# EAGLE board On off system (EAGLE 9.7.0)

Size 211.69 x 70.56 mm. Coordinates in mm from the lower left corner, seen from the top.
Outline: 0,0 211.69,0 211.69,70.56 0,70.56 0,0
Copper layers (1*16): Top 0.035mm / dielectric 1.5mm / Bottom 0.035mm
Design rules "default": minimum track width 6mil, minimum drill 0.35mm, track to track 6mil, track to pad 6mil, pad to pad 6mil, via to via 6mil, smd to smd 6mil, copper to edge 40mil, drill to drill 6mil, minimum pad ring 10mil, minimum via ring 8mil, stop-mask expansion 4mil, vias tented up to drill 0mil, thermal gap 10mil

## Footprints (pad centres in the part's own frame; a part is rotated, then mirrored left to right if it is on the bottom)
DIODE-AXIAL = drill 1: 1 -5.08,0; 2 5.08,0
MOTOR = drill 1.118 pad 3.15 octagon: + 2.54,0; - -2.54,0
BATTERY-GENERIC = drill 1.118 pad 3.15 octagon: + 2.54,0; - -2.54,0
RESAD1016W63L850D250B = drill 0.83 pad 1.43: 1 -5.08,0; 2 5.08,0
SWITCH-MOMENTARY-PTH-6.5MM = drill 1.016 pad 1.88: 1 -3.251,2.261; 2 3.251,2.261; 3 -3.251,-2.261; 4 3.251,-2.261
TO92 = drill 0.813 octagon: 1 -1.27,0; 2 0,1.905; 3 1.27,0
ARDUINO-UNO-R3-SHIELD = drill 1.016 pad 1.88: 3.3V 24.13,-2.54; 5V 24.13,0; A0 24.13,12.7; A1 24.13,15.24; A2 24.13,17.78; A3 24.13,20.32; A4 24.13,22.86; A5 24.13,25.4; AREF -24.13,-13.97; D2 -24.13,20.32; D3 -24.13,17.78; D4 -24.13,15.24; D5 -24.13,12.7; D6 -24.13,10.16; D7 -24.13,7.62; D8 -24.13,3.81; D9 -24.13,1.27; D10 -24.13,-1.27; D11 -24.13,-3.81; D12 -24.13,-6.35; D13 -24.13,-8.89; GND@0 24.13,2.54; GND@1 24.13,5.08; GND@2 -24.13,-11.43; IOREF 24.13,-7.62; NC 24.13,-10.16; RES 24.13,-5.08; RX -24.13,25.4; SCL -24.13,-19.05; SDA -24.13,-16.51; TX -24.13,22.86; VIN 24.13,7.62

## Placement (x,y rotation side)
D1  DIODEDIODE-AXIAL  [DIODE-AXIAL]  142.32,43.03 90 top
M1  MOTOR_HDR  [MOTOR]  126.48,59.38 0 top
P1  BATTERYGENERIC  [BATTERY-GENERIC]  203.43,43.36 180 top
R1  10k  [RESAD1016W63L850D250B]  150.57,64.23 0 top
R2  1k  [RESAD1016W63L850D250B]  96.6,35.41 0 top
S1  SWITCH_MOMENTARY  [SWITCH-MOMENTARY-PTH-6.5MM]  104.22,26.52 90 top
T1  NMOSFET  [TO92]  147.4,40.49 0 top
U1  ARDUINO-UNO-R3-SHIELD  [ARDUINO-UNO-R3-SHIELD]  47.88,29.84 270 top

## Library data of the parts
D1 M1 P1 R1 R2 S1 U1 = Tinkercad
T1 = Tinkercad; CATEGORY: Transistor; SUB-CATEGORY: MOSFET; TYPE: N-Channel

## Nets
M1_+: D1.1 M1.+ T1.1
P1+: D1.2 M1.- P1.+ S1.3 S1.4
P1-: P1.- R1.2 R2.1 T1.3 U1.GND@0 U1.GND@1 U1.GND@2
U1_D2: R2.2 S1.1 S1.2 U1.D2
U1_D6: R1.1 T1.2 U1.D6

## Tracks (layer width: path | path; a pad name or v marks a point on that pad's centre or on a via)
M1_+  (2 unrouted)
P1+  (4 unrouted)
P1-  (6 unrouted)
U1_D2  (3 unrouted)
U1_D6  (2 unrouted)